# EAGLE board Laboratory-3 (EAGLE 9.7.0)

Size 138.39 x 168.4 mm. Coordinates in mm from the lower left corner, seen from the top.
Outline: 0,0 138.39,0 138.39,168.4 0,168.4 0,0
Copper layers (1*16): Top 0.035mm / dielectric 1.5mm / Bottom 0.035mm
Design rules "default": minimum track width 6mil, minimum drill 0.35mm, track to track 6mil, track to pad 6mil, pad to pad 6mil, via to via 6mil, smd to smd 6mil, copper to edge 40mil, drill to drill 6mil, minimum pad ring 10mil, minimum via ring 8mil, stop-mask expansion 4mil, vias tented up to drill 0mil, thermal gap 10mil

## Footprints (pad centres in the part's own frame; a part is rotated, then mirrored left to right if it is on the bottom)
LED-RGB-5MM = drill 0.9: B 0.635,0.635; C -0.635,-0.635; G 1.905,-0.635; R -1.905,0.635
LEDRD254W60D565H860B = drill 0.981 pad 1.581: 1 -1.27,0; 2 1.27,0
RESAD1016W63L850D250B = drill 0.83 pad 1.43: 1 -5.08,0; 2 5.08,0
HA-06-SM065 = drill 1 pad 1.676: 1 -2.54,-2.54; 2 0,2.54; 3 2.54,-2.54
ARDUINO-UNO-R3-SHIELD = drill 1.016 pad 1.88: 3.3V 24.13,-2.54; 5V 24.13,0; A0 24.13,12.7; A1 24.13,15.24; A2 24.13,17.78; A3 24.13,20.32; A4 24.13,22.86; A5 24.13,25.4; AREF -24.13,-13.97; D2 -24.13,20.32; D3 -24.13,17.78; D4 -24.13,15.24; D5 -24.13,12.7; D6 -24.13,10.16; D7 -24.13,7.62; D8 -24.13,3.81; D9 -24.13,1.27; D10 -24.13,-1.27; D11 -24.13,-3.81; D12 -24.13,-6.35; D13 -24.13,-8.89; GND@0 24.13,2.54; GND@1 24.13,5.08; GND@2 -24.13,-11.43; IOREF 24.13,-7.62; NC 24.13,-10.16; RES 24.13,-5.08; RX -24.13,25.4; SCL -24.13,-19.05; SDA -24.13,-16.51; TX -24.13,22.86; VIN 24.13,7.62
TO92 = drill 0.813 octagon: 1 -1.27,0; 2 0,1.905; 3 1.27,0
JHD-162A = drill 1.016 long: 1 -19.05,0; 2 -16.51,0; 3 -13.97,0; 4 -11.43,0; 5 -8.89,0; 6 -6.35,0; 7 -3.81,0; 8 -1.27,0; 9 1.27,0; 10 3.81,0; 11 6.35,0; 12 8.89,0; 13 11.43,0; 14 13.97,0; 15 16.51,0; 16 19.05,0

## Placement (x,y rotation side)
D1  LED-RGBRCBG-PTH  [LED-RGB-5MM]  87.38,160.91 0 top
D5  RED  [LEDRD254W60D565H860B]  130.79,40.2 180 top
R1  1k  [RESAD1016W63L850D250B]  75.9,155.69 90 top
R2  10k  [RESAD1016W63L850D250B]  49.78,69.52 90 top
R8  1k  [RESAD1016W63L850D250B]  132.06,35.12 90 top
RPOT4  10k  [HA-06-SM065]  107.42,38.95 0 top
U1  ARDUINO-UNO-R3-SHIELD  [ARDUINO-UNO-R3-SHIELD]  87.13,107.05 270 top
U2  TMP36GT9Z_TO92  [TO92]  128.94,86.12 0 top
U3  LCD-16X2JHD-162A  [JHD-162A]  30.73,36.63 0 top

## Library data of the parts
D1 R1 R2 R8 RPOT4 U1-U3 = Tinkercad
D5 = Tinkercad; CATEGORY: Opto-Electronic; SUB-CATEGORY: LED; VALUE: LED_RED

## Nets
D1_C: D1.C R1.2
D5_A: D5.1 R8.2
U1_5V: RPOT4.1 U1.5V U2.3 U3.2 U3.15
U1_A0: U1.A0 U2.2
U1_D2: U1.D2 U3.14
U1_D3: U1.D3 U3.13
U1_D4: U1.D4 U3.12
U1_D5: U1.D5 U3.11
U1_D8: D1.G U1.D8
U1_D9: D1.B U1.D9
U1_D10: D1.R U1.D10
U1_D11: U1.D11 U3.6
U1_D12: U1.D12 U3.4
U1_GND: D5.2 R1.1 R2.2 RPOT4.3 U1.GND@0 U1.GND@1 U1.GND@2 U2.1 U3.1 U3.5
U3_LED-: R2.1 U3.16
U3_VO: R8.1 RPOT4.2 U3.3

## Tracks (layer width: path | path; a pad name or v marks a point on that pad's centre or on a via)
D1_C  (1 unrouted)
D5_A  (1 unrouted)
U1_5V  (4 unrouted)
U1_A0  (1 unrouted)
U1_D2  (1 unrouted)
U1_D3  (1 unrouted)
U1_D4  (1 unrouted)
U1_D5  (1 unrouted)
U1_D8  (1 unrouted)
U1_D9  (1 unrouted)
U1_D10  (1 unrouted)
U1_D11  (1 unrouted)
U1_D12  (1 unrouted)
U1_GND  (9 unrouted)
U3_LED-  (1 unrouted)
U3_VO  (2 unrouted)